# EAGLE board PoE_Board (EAGLE 7.3.0)
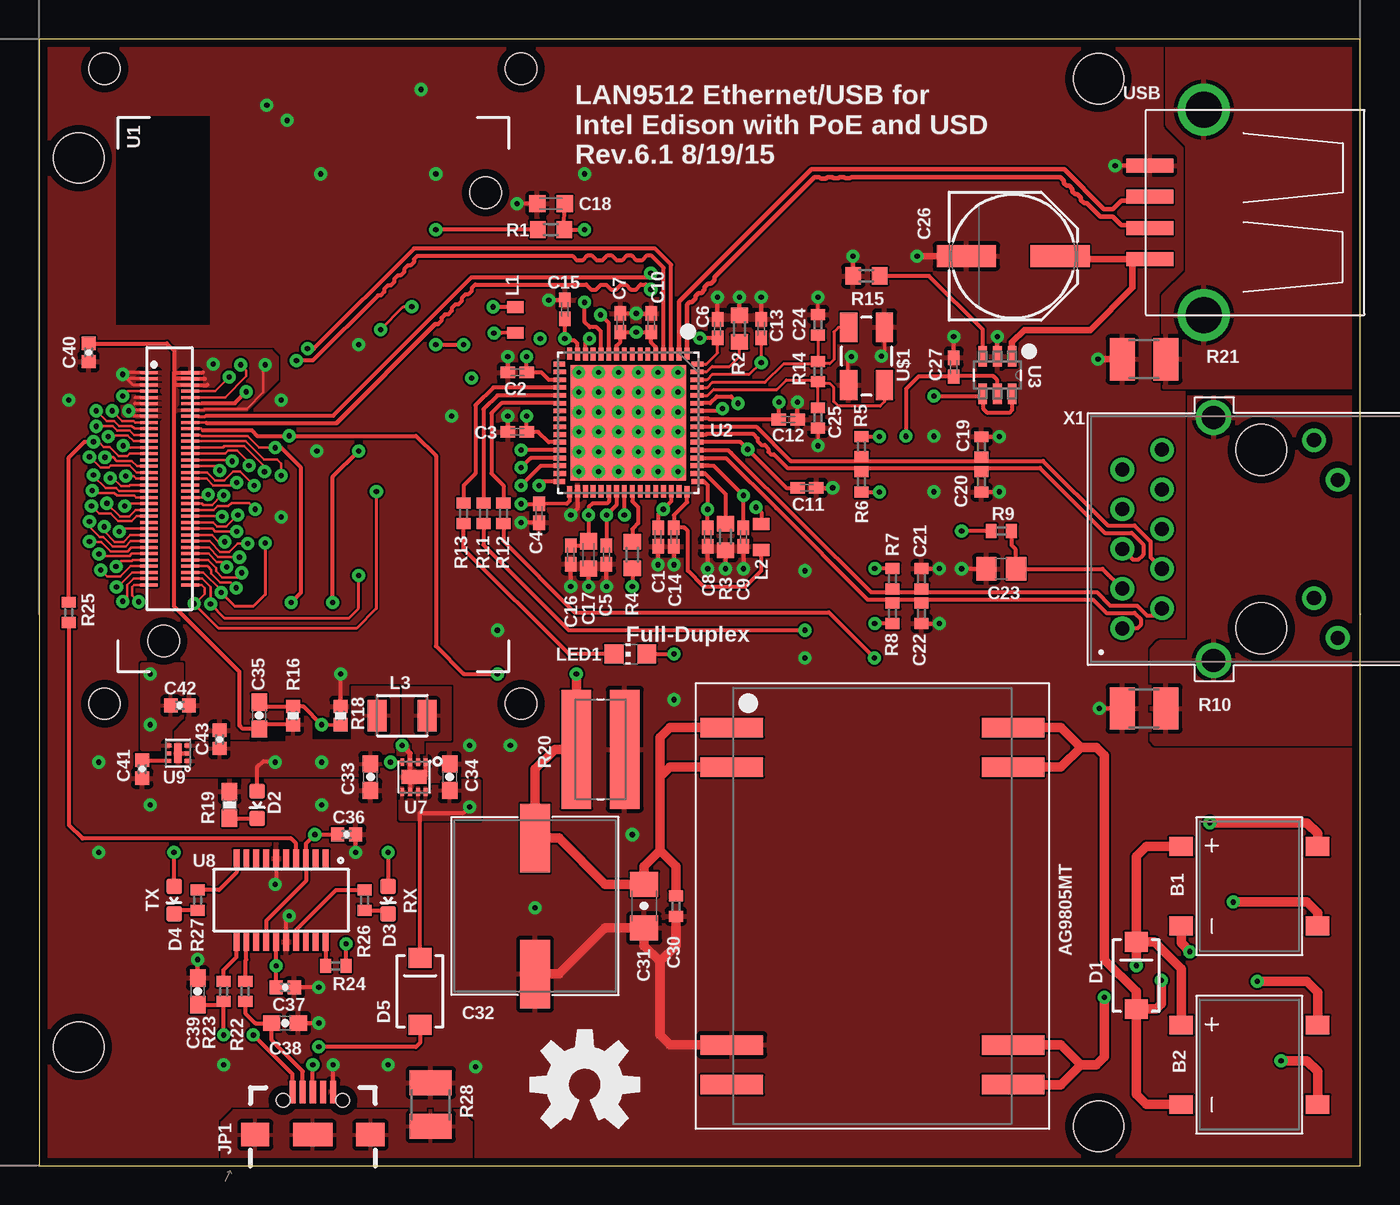
[diagram p0: board, top side]
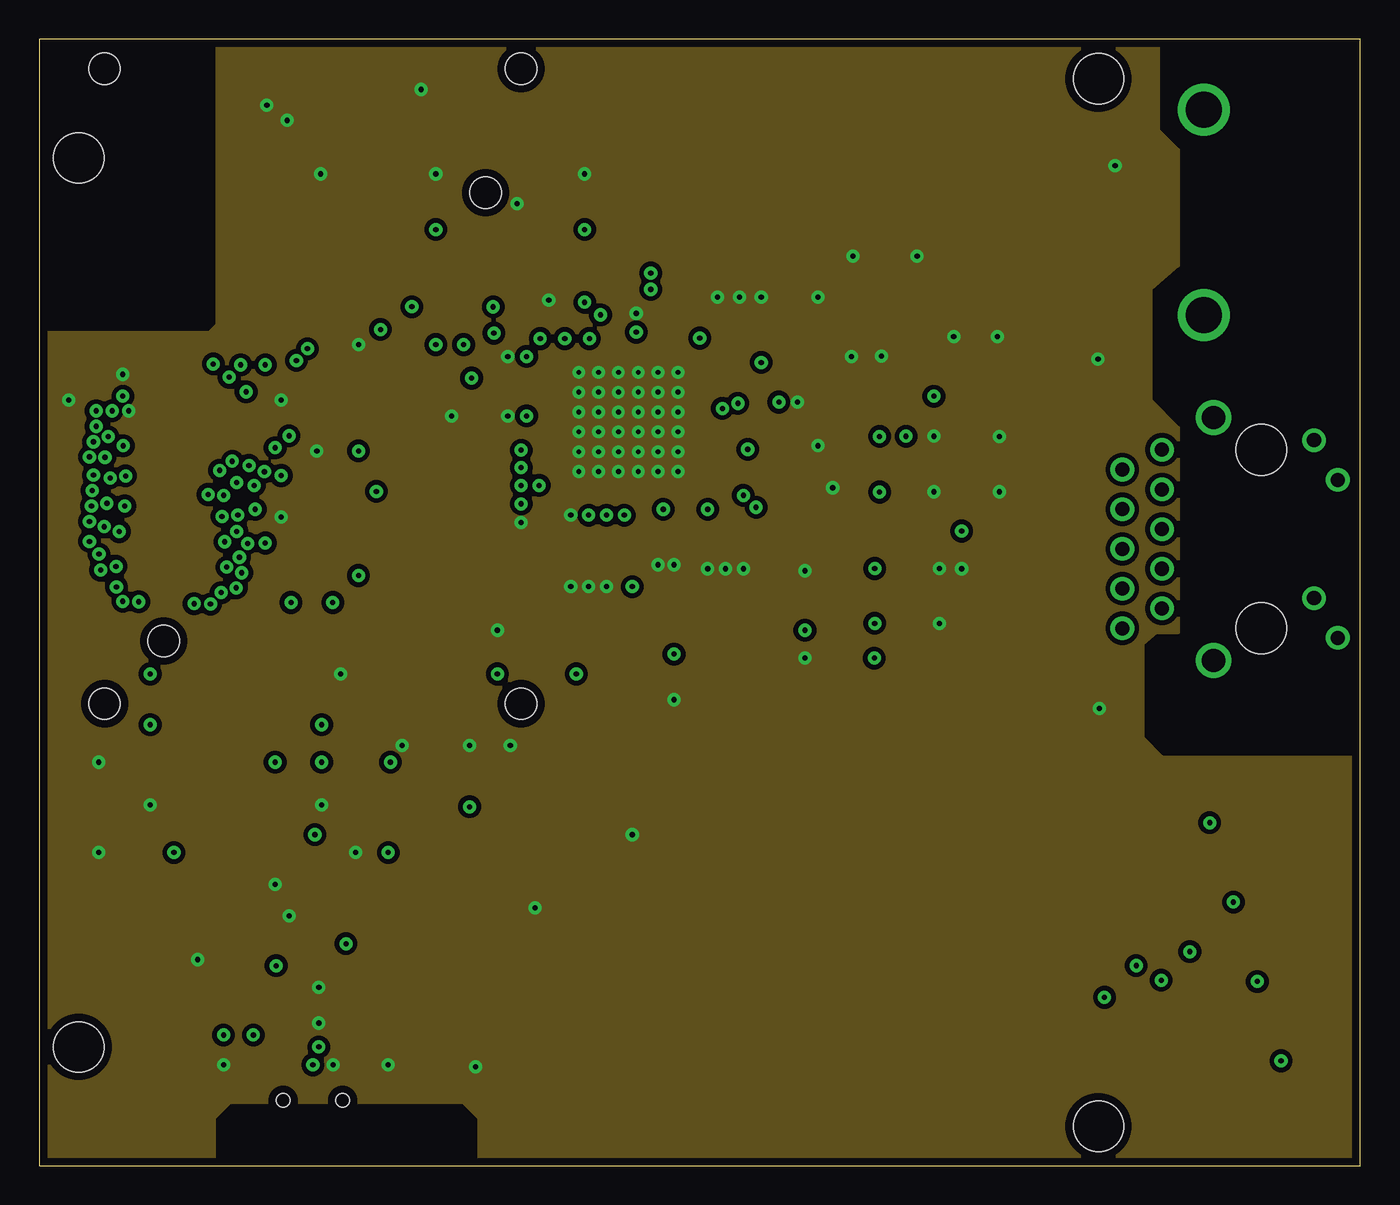
[diagram p1: board, inner layer gnd]
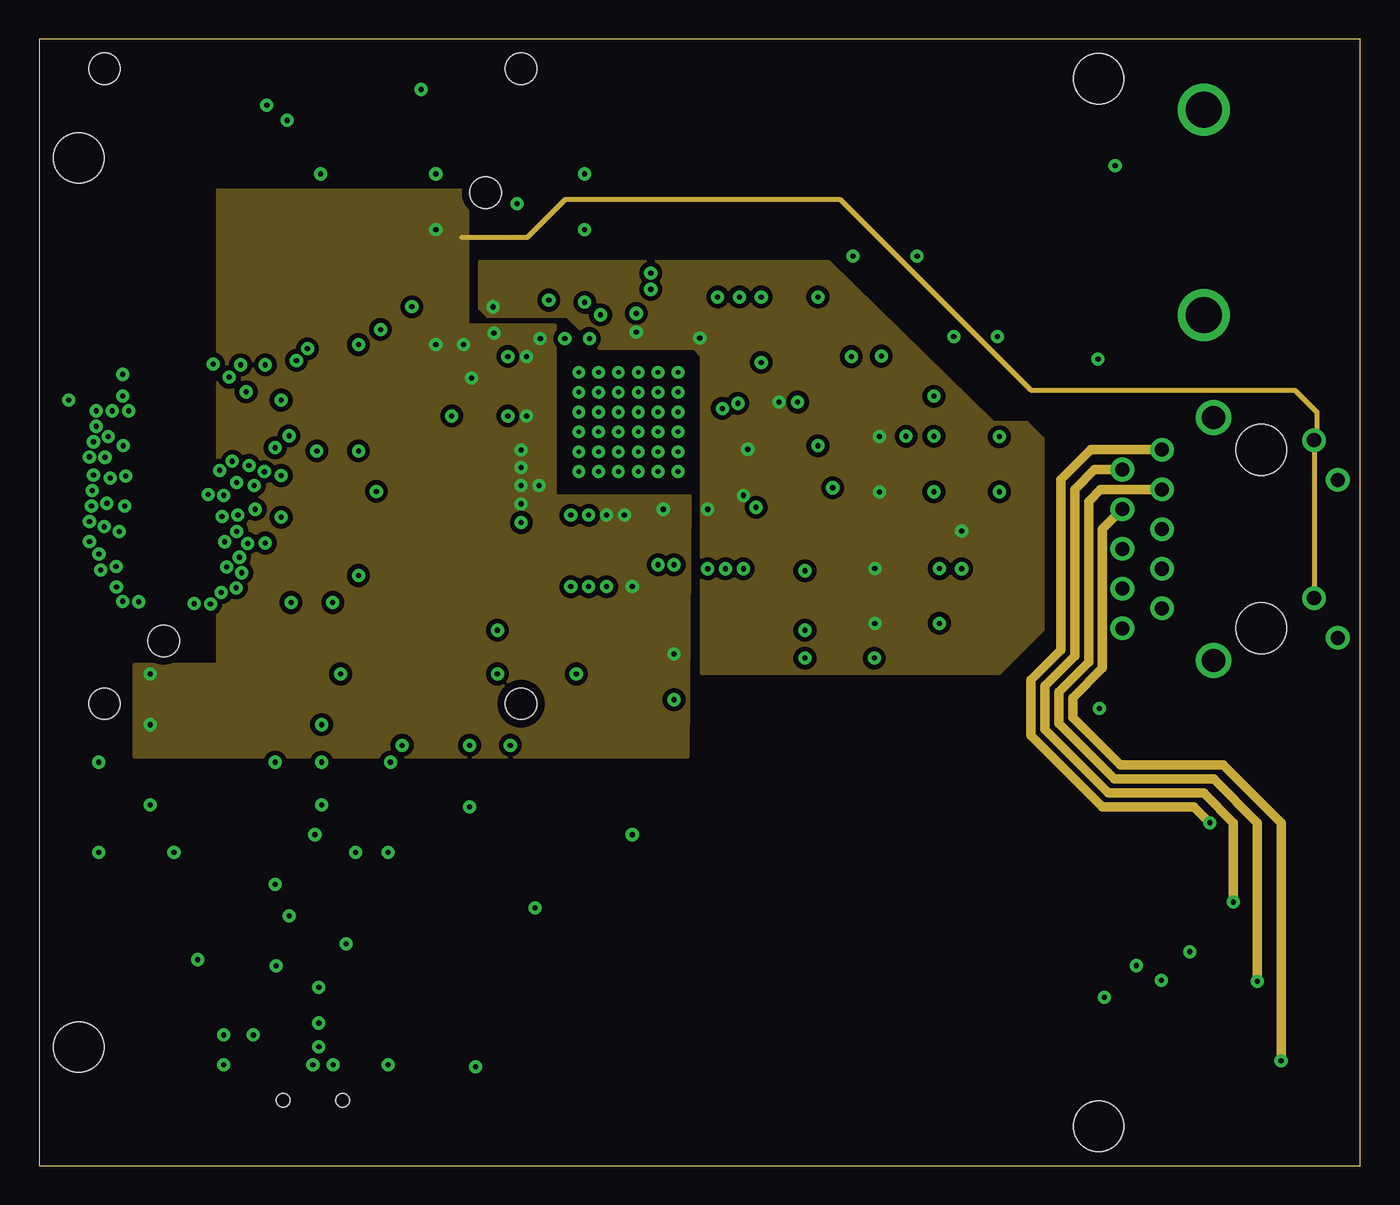
[diagram p2: board, inner layer pwr]
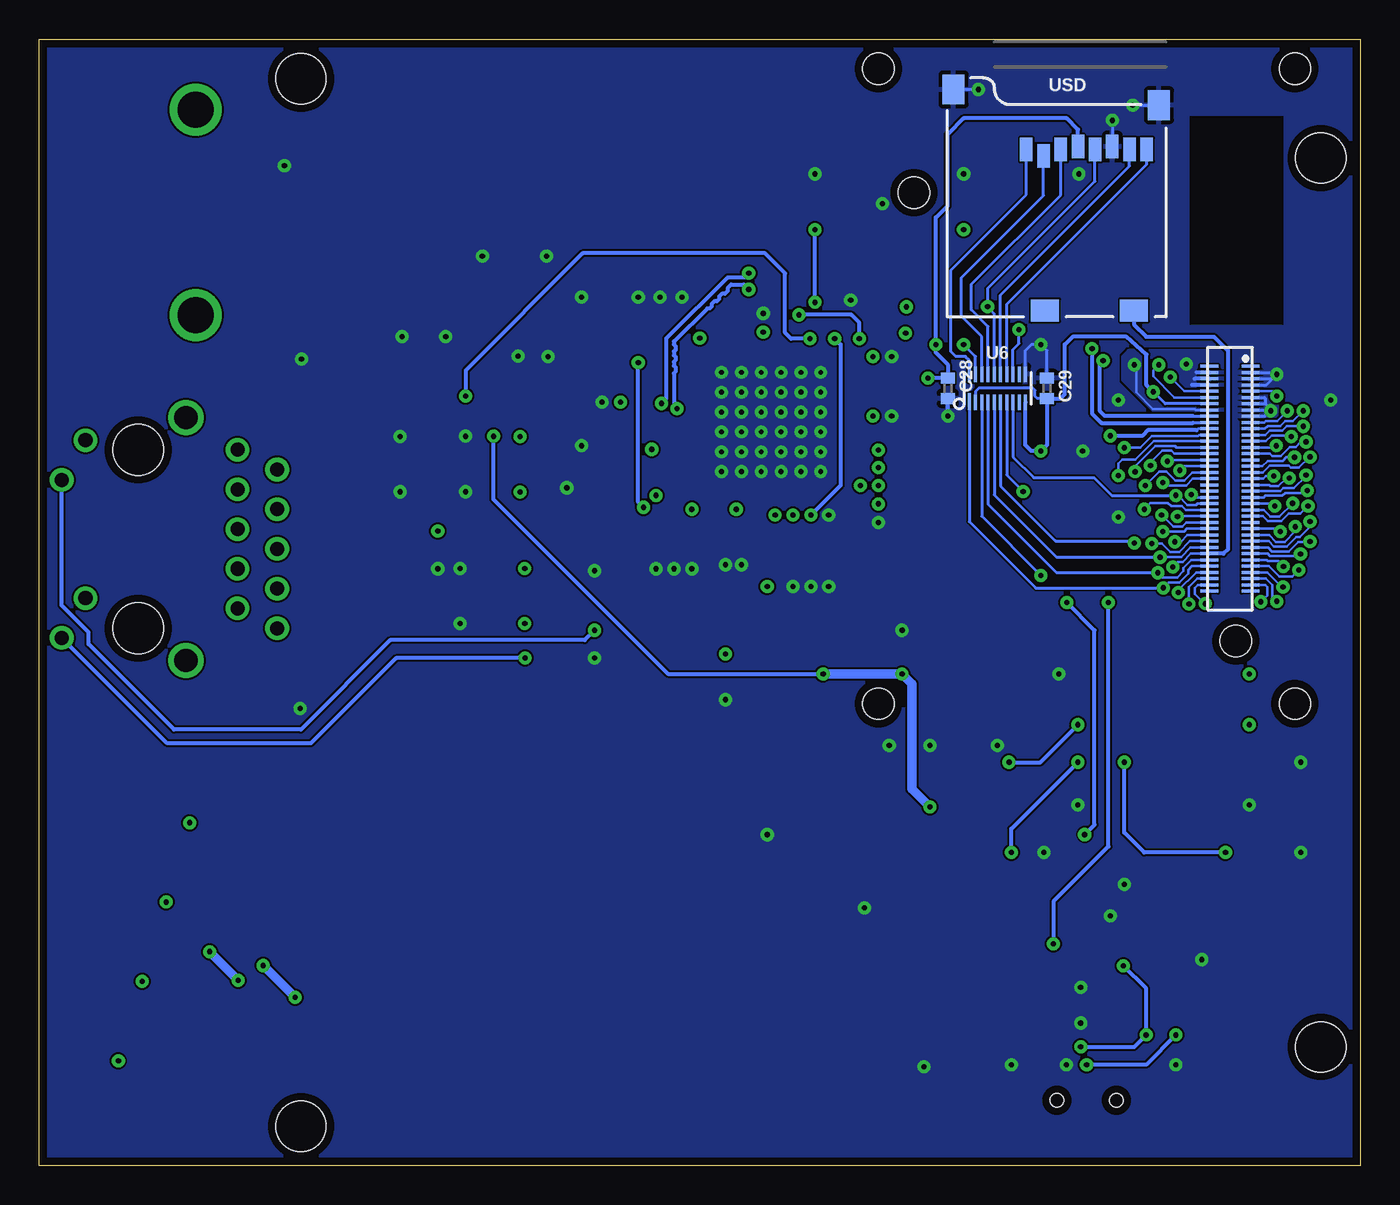
[diagram p3: board, bottom side, seen from below]

Size 84.58 x 72.14 mm. Coordinates in mm from the lower left corner, seen from the top.
Outline: 0,0 84.58,0 84.58,72.14 0,72.14 0,0
Copper layers (1*2*3*16): Top 0.035mm / dielectric 1.5mm / gnd 0.035mm / dielectric 0.15mm / pwr 0.035mm / dielectric 0.2mm / Bottom 0.035mm
Design rules "SparkFun1 *": minimum track width 5mil, minimum drill 6mil, track to track 5mil, track to pad 5mil, pad to pad 5mil, via to via 5mil, smd to smd 5mil, copper to edge 20mil, drill to drill 8mil, minimum pad ring 12mil, minimum via ring 10mil, stop-mask expansion 4mil, vias tented up to drill 25mil, thermal gap 10mil
Holes 2 mm at 4.19,29.59 30.86,29.59 30.86,70.23 4.19,70.23
Holes 3.2 mm at 2.54,7.62 2.54,64.52 67.82,69.6 67.82,2.54
tRestrict: area 5,53.8 to 10.9,67.2
bRestrict: area 5,53.8 to 10.9,67.2

## Footprints (pad centres in the part's own frame; a part is rotated, then mirrored left to right if it is on the bottom)
AG9800M_SMT = smd 1.25 x 4: P$1 -11.43,-9; P$2 -8.89,-9; P$3 8.89,-9; P$4 11.43,-9; P$5 11.43,9; P$6 8.89,9; P$7 -8.89,9; P$8 -11.43,9
DFS = smd 1.2 x 1.52: + 2.54,4.369; - -2.54,4.369; ~@1 -2.54,-4.369; ~@2 2.54,-4.369
C0402K = smd 0.925 x 0.74: 1 -0.6,0; 2 0.6,0
C0603K = smd 1.05 x 1.08: 1 -0.875,0; 2 0.875,0
C0402 = smd 0.7 x 0.9: 1 -0.65,0; 2 0.65,0
C0805 = smd 1.3 x 1.5: 1 -0.95,0; 2 0.95,0
PANASONIC_E = smd 3.8 x 1.4: + 3,0; - -3,0
1206-CAP = smd 1.6 x 1.8: 1 -1.4,0; 2 1.4,0
16SVPE470M = smd 4.4 x 1.9: 1 -4.35,0; 2 4.35,0
0603-CAP = smd 1.1 x 1: 1 -0.85,0; 2 0.85,0
0402-CAP = smd 0.85 x 0.9: 1 -0.58,0; 2 0.58,0
SMA-DIODE = smd 1.27 x 1.47: A -2.15,0; C 2.15,0
LED-0603 = smd 1 x 1: A 0,-0.877; C 0,0.877
USB-B-MICRO-SMD_V03 = smd 1.45 x 0.4: D+1 2.725,0; D-1 2.725,0.65; GND1 2.725,-1.3; ID1 2.725,-0.65; VBUS1 2.725,1.3 | smd 1.5 x 1.8: SHIELD1 0,3.685; SHIELD2 0,-3.685 | smd 1.5 x 2.5: SHIELD3 0,0 | hole 0.85: 2.2,1.9; 2.2,-1.9
L0603 = smd 0.75 x 1.05: 1 -0.825,0; 2 0.825,0
1210 = smd 1.2 x 2: 1 -1.6,0; 2 1.6,0
CHIP-LED0805 = smd 1.2 x 1.2: A 0,-1.05; C 0,1.05
R0603 = smd 1 x 1.1: 1 -0.85,0; 2 0.85,0
R0402 = smd 0.7 x 0.9: 1 -0.65,0; 2 0.65,0
R1210 = smd 1.6 x 2.7: 1 -1.4,0; 2 1.4,0
0402-RES = smd 0.85 x 0.9: 1 -0.58,0; 2 0.58,0
0603-RES = smd 1.1 x 1: 1 -0.85,0; 2 0.85,0
R1225 = smd 1.9 x 7.6: P$1 -1.55,0; P$2 1.55,0
EDISON_DAUGHTER = smd 1.14 x 0.2: 1 1.98,19.17; 2 4.62,19.17; 3 1.98,18.77; 4 4.62,18.77; 5 1.98,18.37; 6 4.62,18.37; 7 1.98,17.97; 8 4.62,17.97; 9 1.98,17.57; 10 4.62,17.57; 11 1.98,17.17; 12 4.62,17.17; 13 1.98,16.77; 14 4.62,16.77; 15 1.98,16.37; 16 4.62,16.37; 17 1.98,15.97; 18 4.62,15.97; 19 1.98,15.57; 20 4.62,15.57; 21 1.98,15.17; 22 4.62,15.17; 23 1.98,14.77; 24 4.62,14.77; 25 1.98,14.37; 26 4.62,14.37; 27 1.98,13.97; 28 4.62,13.97; 29 1.98,13.57; 30 4.62,13.57; 31 1.98,13.17; 32 4.62,13.17; 33 1.98,12.77; 34 4.62,12.77; 35 1.98,12.37; 36 4.62,12.37; 37 1.98,11.97; 38 4.62,11.97; 39 1.98,11.57; 40 4.62,11.57; 41 1.98,11.17; 42 4.62,11.17; 43 1.98,10.77; 44 4.62,10.77; 45 1.98,10.37; 46 4.62,10.37; 47 1.98,9.97; 48 4.62,9.97; 49 1.98,9.57; 50 4.62,9.57; 51 1.98,9.17; 52 4.62,9.17; 53 1.98,8.77; 54 4.62,8.77; 55 1.98,8.37; 56 4.62,8.37; 57 1.98,7.97; 58 4.62,7.97; 59 1.98,7.57; 60 4.62,7.57; 61 1.98,7.17; 62 4.62,7.17; 63 1.98,6.77; 64 4.62,6.77; 65 1.98,6.37; 66 4.62,6.37; 67 1.98,5.97; 68 4.62,5.97; 69 1.98,5.57; 70 4.62,5.57 | hole 2: 23.53,30.67; 2.93,1.98
QFN50P900X900X100-65N = smd 0.762 x 0.305: 1 -4.42,3.759; 16 -4.42,-3.759; 33 4.42,-3.759; 48 4.42,3.759 | smd 0.813 x 0.305: 2 -4.394,3.251; 3 -4.394,2.743; 4 -4.394,2.261; 5 -4.394,1.753; 6 -4.394,1.245; 7 -4.394,0.762; 8 -4.394,0.254; 9 -4.394,-0.254; 10 -4.394,-0.762; 11 -4.394,-1.245; 12 -4.394,-1.753; 13 -4.394,-2.261; 14 -4.394,-2.743; 15 -4.394,-3.251; 34 4.394,-3.251; 35 4.394,-2.743; 36 4.394,-2.261; 37 4.394,-1.753; 38 4.394,-1.245; 39 4.394,-0.762; 40 4.394,-0.254; 41 4.394,0.254; 42 4.394,0.762; 43 4.394,1.245; 44 4.394,1.753; 45 4.394,2.261; 46 4.394,2.743; 47 4.394,3.251 | smd 0.305 x 0.762: 17 -3.759,-4.42; 32 3.759,-4.42; 49 3.759,4.42; 64 -3.759,4.42 | smd 0.305 x 0.813: 18 -3.251,-4.394; 19 -2.743,-4.394; 20 -2.261,-4.394; 21 -1.753,-4.394; 22 -1.245,-4.394; 23 -0.762,-4.394; 24 -0.254,-4.394; 25 0.254,-4.394; 26 0.762,-4.394; 27 1.245,-4.394; 28 1.753,-4.394; 29 2.261,-4.394; 30 2.743,-4.394; 31 3.251,-4.394; 50 3.251,4.394; 51 2.743,4.394; 52 2.261,4.394; 53 1.753,4.394; 54 1.245,4.394; 55 0.762,4.394; 56 0.254,4.394; 57 -0.254,4.394; 58 -0.762,4.394; 59 -1.245,4.394; 60 -1.753,4.394; 61 -2.261,4.394; 62 -2.743,4.394; 63 -3.251,4.394 | smd 7.391 x 7.391: 65 0,0
21-0058I = smd 1.321 x 0.559: 1 -1.194,0.94; 2 -1.194,0; 3 -1.194,-0.94; 4 1.194,-0.94; 5 1.194,0; 6 1.194,0.94
DF40C-70DP-0.4(51) = smd 0.2 x 1.14 bottom: 1 6.8,1.32; 2 6.8,-1.32; 3 6.4,1.32; 4 6.4,-1.32; 5 6,1.32; 6 6,-1.32; 7 5.6,1.32; 8 5.6,-1.32; 9 5.2,1.32; 10 5.2,-1.32; 11 4.8,1.32; 12 4.8,-1.32; 13 4.4,1.32; 14 4.4,-1.32; 15 4,1.32; 16 4,-1.32; 17 3.6,1.32; 18 3.6,-1.32; 19 3.2,1.32; 20 3.2,-1.32; 21 2.8,1.32; 22 2.8,-1.32; 23 2.4,1.32; 24 2.4,-1.32; 25 2,1.32; 26 2,-1.32; 27 1.6,1.32; 28 1.6,-1.32; 29 1.2,1.32; 30 1.2,-1.32; 31 0.8,1.32; 32 0.8,-1.32; 33 0.4,1.32; 34 0.4,-1.32; 35 0,1.32; 36 0,-1.32; 37 -0.4,1.32; 38 -0.4,-1.32; 39 -0.8,1.32; 40 -0.8,-1.32; 41 -1.2,1.32; 42 -1.2,-1.32; 43 -1.6,1.32; 44 -1.6,-1.32; 45 -2,1.32; 46 -2,-1.32; 47 -2.4,1.32; 48 -2.4,-1.32; 49 -2.8,1.32; 50 -2.8,-1.32; 51 -3.2,1.32; 52 -3.2,-1.32; 53 -3.6,1.32; 54 -3.6,-1.32; 55 -4,1.32; 56 -4,-1.32; 57 -4.4,1.32; 58 -4.4,-1.32; 59 -4.8,1.32; 60 -4.8,-1.32; 61 -5.2,1.32; 62 -5.2,-1.32; 63 -5.6,1.32; 64 -5.6,-1.32; 65 -6,1.32; 66 -6,-1.32; 67 -6.4,1.32; 68 -6.4,-1.32; 69 -6.8,1.32; 70 -6.8,-1.32; NC1 7.2,1.32; NC2 7.2,-1.32; NC3 -7.2,-1.32; NC4 -7.2,1.32
UFDFN-20 = smd 0.2 x 1.1: 1 -1.8,-0.85 | smd 0.2 x 1: 2 -1.4,-0.9; 3 -1,-0.9; 4 -0.6,-0.9; 5 -0.2,-0.9; 6 0.2,-0.9; 7 0.6,-0.9; 8 1,-0.9; 9 1.4,-0.9; 10 1.8,-0.9; 11 1.8,0.9; 12 1.4,0.9; 13 1,0.9; 14 0.6,0.9; 15 0.2,0.9; 16 -0.2,0.9; 17 -0.6,0.9; 18 -1,0.9; 19 -1.4,0.9; 20 -1.8,0.9
WSON-8-PAD = smd 0.25 x 0.5: 1 -0.75,-0.95; 2 -0.25,-0.95; 3 0.25,-0.95; 4 0.75,-0.95; 5 0.75,0.95; 6 0.25,0.95; 7 -0.25,0.95; 8 -0.75,0.95 | smd 1.6 x 0.9: PAD 0,0
SSOP20_L = smd 0.381 x 1.143: 1 -2.857,-2.68; 2 -2.223,-2.68; 3 -1.587,-2.68; 4 -0.953,-2.68; 5 -0.318,-2.68; 6 0.318,-2.68; 7 0.953,-2.68; 8 1.587,-2.68; 9 2.223,-2.68; 10 2.857,-2.68; 11 2.857,2.68; 12 2.223,2.68; 13 1.587,2.68; 14 0.953,2.68; 15 0.318,2.68; 16 -0.318,2.68; 17 -0.953,2.68; 18 -1.587,2.68; 19 -2.223,2.68; 20 -2.857,2.68
6-UFDFN = smd 1.25 x 0.5: GND 0,0 | smd 0.26 x 0.4: P1 -0.5,-0.625; P2 0,-0.625; P3 0.5,-0.625; P4 0.5,0.625; P5 0,0.625; P6 -0.5,0.625
CRYSTAL-SMD-5X3 = smd 1.9 x 1.1: 1 -1.85,-1.15; 2 1.85,-1.15; 3 1.85,1.15; 4 -1.85,1.15
USB-A-S = smd 3 x 0.9: D+ 3.45,-1; D- 3.45,1; GND 3.45,-3; VBUS 3.45,3 | drill 2.311: P$5 0,-6.566; P$6 0,6.566
MICRO-SD-SOCKET-PP = smd 0.8 x 1.5: 1 -8.94,10.7; 2 -7.84,10.3; 3 -6.74,10.7; 4 -5.64,10.9; 5 -4.54,10.7; 6 -3.44,10.9; 7 -2.34,10.7; 8 -1.24,10.7 | smd 1.8 x 1.4: CD1 -2.05,0.4; CD2 -7.75,0.4 | smd 1.4 x 1.9: GND1 -13.6,14.55; GND3 -0.45,13.55
RB1-125BHQ1A = drill 0.9: L1 6.325,-3.38; L2 3.785,-4.9; L3 -3.785,-3.38; L4 -6.325,-4.9; R1 -5.715,8.89; R2 -4.445,6.35; R3 -3.175,8.89; R4 -1.905,6.35; R5 -0.635,8.89; R6 0.635,6.35; R7 1.905,8.89; R8 3.175,6.35; R9 4.445,8.89; R10 5.715,6.35 | drill 1.5: S1 -7.775,3.05; S2 7.775,3.05 | hole 3.25: -5.715,0; 5.715,0

## Placement (x,y rotation side)
AG9805MT  [AG9800M_SMT]  53.34,16.64 270 top
B1  [DFS]  77.47,17.91 90 top
B2  [DFS]  77.47,6.48 90 top
C1  0.1  [C0402K]  39.62,40.26 270 top
C2  0.1  [C0402K]  30.61,50.8 180 top
C3  0.1  [C0402K]  30.61,46.99 180 top
C4  0.1  [C0402K]  32,41.78 270 top
C5  0.1  [C0402K]  36.32,39.12 270 top
C6  0.1  [C0402K]  43.43,53.59 90 top
C7  0.1  [C0402K]  37.21,53.98 90 top
C8  0.1  [C0402K]  42.8,40.26 270 top
C9  0.1  [C0402K]  45.09,40.26 270 top
C10  0.1  [C0402K]  39.19,53.98 90 top
C11  0.1  [C0402K]  49.15,43.41 0 top
C12  0.1  [C0402K]  47.96,47.78 0 top
C13  1.0  [C0402K]  46.23,53.59 90 top
C14  0.1  [C0402K]  40.64,40.26 270 top
C15  0.1  [C0402K]  33.66,54.83 90 top
C16  0.1  [C0402K]  34.04,39.12 270 top
C17  4.7  [C0603K]  35.18,39.12 270 top
C18  0.01uF  [C0603K]  32.77,61.59 180 top
C19  15pF  [C0402]  60.33,46.02 90 top
C20  15pF  [C0402]  60.33,43.79 270 top
C21  15pF  [C0402]  56.49,37.59 90 top
C22  15pF  [C0402]  56.49,35.38 270 top
C23  0.022uF  [C0805]  61.59,38.23 180 top
C24  33pF  [C0402]  49.86,53.85 90 top
C25  33pF  [C0402]  49.86,47.88 270 top
C26  150uF  [PANASONIC_E]  62.36,58.24 0 top
C27  1.0  [C0402K]  58.55,51.13 90 top
C28  [C0402]  26.42,49.78 90 bottom
C29  [C0402]  20.07,49.78 270 bottom
C30  [C0402]  40.77,16.64 90 top
C31  [1206-CAP]  38.73,16.64 90 top
C32  [16SVPE470M]  31.75,16.64 90 top
C33  [0603-CAP]  21.21,24.89 90 top
C34  [0603-CAP]  26.29,24.89 270 top
C35  [0603-CAP]  14.1,28.83 90 top
C36  .1uF  [0402-CAP]  19.68,21.21 180 top
C37  .1uF  [0402-CAP]  15.76,11.42 180 top
C38  47pF  [0603-CAP]  15.75,9.14 0 top
C39  47pF  [0603-CAP]  10.16,11.18 90 top
C40  [0402-CAP]  3.17,52.07 90 top
C41  [0402-CAP]  6.6,25.4 270 top
C42  [0402-CAP]  9.02,29.46 0 top
C43  [0402-CAP]  11.56,27.3 90 top
D1  [SMA-DIODE]  70.23,12.19 90 top
D2  [LED-0603]  13.97,23.11 180 top
D3  RED  [LED-0603]  22.35,17.02 180 top
D4  YELLOW  [LED-0603]  8.64,17.02 180 top
D5  [SMA-DIODE]  24.38,11.18 90 top
E$2  [OSHW-LOGO-L]  34.92,5.21 0 top
JP1  USB-B-MICRO-SMD_V03  [USB-B-MICRO-SMD_V03]  17.53,2.01 90 top
L1  2.0A 120Ohm  [L0603]  30.49,54.16 90 top
L2  2.0A 120Ohm  [L0603]  46.23,40.26 270 top
L3  [1210]  23.24,28.83 0 top
LED1  Green LED  [CHIP-LED0805]  37.85,32.77 90 top
R1  10K  [R0603]  32.77,59.94 180 top
R2  12K  [R0603]  44.83,53.59 90 top
R3  12.4K  [R0603]  43.94,40.26 270 top
R4  10K  [R0603]  37.97,39.12 270 top
R5  49.9  [R0402]  52.65,46.05 90 top
R6  49.9  [R0402]  52.65,43.79 270 top
R7  49.9  [R0402]  54.64,37.59 90 top
R8  49.9  [R0402]  54.64,35.38 270 top
R9  10  [R0402]  61.59,40.64 180 top
R10  0  [R1210]  70.74,29.29 180 top
R11  330  [R0402]  28.45,41.78 90 top
R12  330  [R0402]  29.72,41.78 90 top
R13  330  [R0402]  27.18,41.78 90 top
R14  1M  [R0402]  49.86,50.85 270 top
R15  56k  [R0603]  52.96,56.97 0 top
R16  [0402-RES]  16.26,28.83 270 top
R18  [0402-RES]  19.3,28.83 270 top
R19  [0603-RES]  12.19,23.11 270 top
R20  [R1225]  35.94,26.67 0 top
R21  0  [R1210]  70.74,51.64 180 top
R22  [R0402]  13.21,11.18 90 top
R23  [R0402]  11.81,11.18 90 top
R24  [R0402]  19,12.81 180 top
R25  [R0402]  1.91,35.43 90 top
R26  [R0402]  20.83,17.02 90 top
R27  [R0402]  10.16,17.02 90 top
R28  0  [R1210]  25.07,3.94 270 top
U1  EDISON_CONNECTOR_FULLMOUNTING_HOLES  [EDISON_DAUGHTER]  5.05,31.62 0 top
U2  LAN9512-JZX  [QFN50P900X900X100-65N]  37.72,47.57 270 top
U3  MAX4995AAUT+  [21-0058I]  61.34,50.62 270 top
U4  EDISON_CONNECTOR_FULLHEADER  [DF40C-70DP-0.4(51)]  8.36,43.99 90 top
U6  [UFDFN-20]  23.24,49.78 0 bottom
U7  [WSON-8-PAD]  24,24.89 180 top
U8  [SSOP20_L]  15.49,17.02 180 top
U9  [6-UFDFN]  8.89,26.42 90 top
U$1  25MHz  [CRYSTAL-SMD-5X3]  52.97,51.84 270 top
USB  USB-A-S  [USB-A-S]  74.55,61.04 180 top
USD  [MICRO-SD-SOCKET-PP]  12.45,54.36 0 bottom
X1  [RB1-125BHQ1A]  78.23,40.13 90 top

## Library data of the parts
AG9805MT B1 B2 C32 R20 U9 X1 = PoEdev
C1-C22 C24 C25 C27 R15 = rcl
C23 R1-R14 R21-R28 = resistor
C26 C31 C33-C43 = SparkFun-Capacitors
C28 C29 L3 = SparkFun-Passives
C30 = eagle-ltspice
D1 D5 = SparkFun-DiscreteSemi
D2-D4 = SparkFun-LED
E$2 = SparkFun-Aesthetics
JP1 USB USD = SparkFun-Connectors
L1 L2 = murata-inductors
LED1 = led
R16 R18 R19 = SparkFun-Resistors
U1 U4 = Edison
U2 = Lan9512; MPN: LAN9512-JZX; OC_FARNELL: 2292586; OC_NEWARK: 66W1988; PACKAGE: 64VQFN; SUPPLIER: Microchip
U3 = MAX4995; MANUFACTURER_PART_NUMBER: max4995aaut+; VENDOR: MAXIM
U6 U8 = SparkFun-DigitalIC
U7 = SparkFun-PowerIC
U$1 = SparkFun-FreqCtrl

## Nets
1_A1_SDDAT2: U1.64 U4.64 U6.1
2_VCCA_1V8: C29.2 C36.2 U1.12 U4.12 U6.2 U6.10 U8.3 U8.14
3_A2_SDDAT3: U1.68 U4.68 U6.3
4_A3_SDCMD: U1.62 U4.62 U6.4
5_A4_SDCLK: U1.58 U4.58 U6.5
6_A5_SDAT0: U1.66 U4.66 U6.6
7_A6_SDDAT1: U1.70 U4.70 U6.7
8_A7_SDCLKFB: U1.44 U4.44 U6.8
14_B6_RSV: U6.14 USD.8
15_B5_DO: U6.15 USD.7
16_B4_13_B7_SCK: U6.13 U6.16 USD.5
17_B3_DI: U6.17 USD.3
18_B2_CS: U6.18 USD.2
20_B1_NC: U6.20 USD.1
DSUSB_N: U2.1 USB.D-
DSUSB_P: U2.2 USB.D+
FB: C35.2 R16.1 R18.2 U7.4
GND: AG9805MT.P$3 C1.2 C2.2 C3.2 C4.2 C5.2 C6.2 C7.2 C8.2 C9.2 C10.2 C11.2 C12.2 C13.2 C14.2 C15.2 C16.2 C17.2 C18.2 C19.2 C20.2 C21.2 C22.2 C23.2 C24.2 C25.2 C26.- C27.2 C28.1 C29.1 C30.1 C31.1 C32.1 C33.1 C34.1 C36.1 C37.1 C38.2 C39.2 C40.1 C41.2 C42.2 C43.2 JP1.GND1 R2.2 R3.2 R10.2 R15.1 R18.1 R19.1 R20.P$2 R21.2 R28.1 U1.1 U1.3 U1.5 U1.9 U1.11 U1.13 U1.15 U2.34 U3.2 U4.1 U4.3 U4.5 U4.9 U4.11 U4.13 U4.15 U6.11 U7.1 U7.3 U7.6 U7.PAD U8.6 U8.16 U9.GND U9.P2 U$1.2 U$1.4 USB.GND USD.6 USD.GND1 USD.GND3
MICRO_SHIELD: JP1.SHIELD1 JP1.SHIELD2 JP1.SHIELD3 R28.2
N$1: C13.1 L2.1 U2.62
N$2: C14.1 L2.2 U2.48
N$3: U2.16
N$4: C15.1 C16.1 C17.1 U2.15 U2.38
N$6: R2.1 U2.63
N$7: C18.1 R1.1 U2.12
N$8: R3.1 U2.50
N$9: R4.1 U2.41
N$10: C23.1 R9.1 X1.R3
N$15: R11.2 U2.21
N$17: R12.1 X1.L4
N$18: R12.2 U2.22
N$19: LED1.C R13.1
N$20: R13.2 U2.20
N$21: C24.1 R14.1 U2.61 U$1.1
N$22: C25.1 R14.2 U2.60 U$1.3
N$23: U2.14 U3.4 U3.6
N$25: C26.+ U3.1 USB.VBUS
N$26: R15.2 U3.3
P7: U1.7 U4.7
P17: U1.17 U4.17
P19: U1.19 U4.19
P21: U1.21 U4.21
P22: R24.1 U1.22 U4.22
P23: U1.23 U4.23
P24: U1.24 U4.24
P25: U1.25 U4.25
P26: U1.26 U4.26
P27: R25.2 U1.27 U4.27
P28: U1.28 U4.28
P30: U1.30 U4.30
P31: U1.31 U4.31
P32: U1.32 U4.32
P33: U1.33 U4.33
P34: U1.34 U4.34
P35: U1.35 U4.35
P36: U1.36 U4.36
P37: U1.37 U4.37
P39: U1.39 U4.39
P41: U1.41 U4.41
P42: U1.42 U4.42
P43: U1.43 U4.43
P45: U1.45 U4.45
P46: U1.46 U4.46
P47: U1.47 U4.47
P48: U1.48 U4.48
P50: U1.50 U4.50
P51: U1.51 U4.51
P52: U1.52 U4.52
P53: U1.53 U4.53
P54: U1.54 U4.54
P55: U1.55 U4.55
P56: U1.56 U4.56
P57: U1.57 U4.57
P59: U1.59 U4.59
P60: U1.60 U4.60 USD.CD1
P61: U1.61 U4.61
P63: U1.63 U4.63
P65: U1.65 U4.65
P67: U1.67 U4.67
P69: U1.69 U4.69
RX_N: C22.1 R8.1 U2.52 X1.R1
RX_P: C21.1 R7.1 U2.53 X1.R2
S$3: AG9805MT.P$5 AG9805MT.P$6 B1.+ B2.+ D1.C
S$4: U1.10 U4.10
S$5: U1.8 U4.8
S$6: C41.1 U9.P6
S$14: AG9805MT.P$7 AG9805MT.P$8 B1.- B2.- D1.A
S$15: C38.1 JP1.D-1 R22.1
S$16: R22.2 U8.12
S$17: C39.1 JP1.D+1 R23.1
S$18: R23.2 U8.11
S$19: D2.C R19.2
S$22: R25.1 U8.4
S$23: R24.2 U8.20
S$24: R27.2 U8.10
S$25: D4.C R27.1
S$26: R26.2 U8.17
S$27: D3.C R26.1
S$28: R11.1 X1.L2
SHLD: R10.1 X1.S1 X1.S2
SW: L3.2 U7.2
TX_N: C19.1 R5.1 U2.56 X1.R4
TX_P: C20.1 R6.1 U2.55 X1.R5
USB_VBUS: AG9805MT.P$1 AG9805MT.P$2 C27.1 C30.2 C31.2 C32.2 C34.2 D5.C R20.P$1 U1.20 U3.5 U4.20 U7.5 U7.7 U7.8
USBDOWN_N: U2.3 U4.18
USBDOWN_P: U2.4 U4.16
USBSHLD: R21.1 USB.P$5 USB.P$6
USBUP_N: U1.18 U2.58
USBUP_P: U1.16 U2.59
VA1: B2.~@1 X1.R7
VA2: B2.~@2 X1.R8
VB1: B1.~@2 X1.R10
VB2: B1.~@1 X1.R9
VBUS1: C37.2 D5.A JP1.VBUS1 U8.15
VDD3IO: C1.1 C2.1 C3.1 C4.1 C5.1 C28.2 C42.1 L1.1 LED1.A R1.2 R4.2 U2.11 U2.19 U2.27 U2.28 U2.29 U2.30 U2.32 U2.33 U2.39 U2.40 U2.46 U6.19 U9.P4 USD.4 X1.L1 X1.L3
VDD33A: C6.1 C7.1 C8.1 C9.1 C10.1 C11.1 C12.1 L1.2 R5.2 R6.2 R7.2 R8.2 R9.2 U2.5 U2.10 U2.49 U2.51 U2.54 U2.57 U2.64
VSYS: C33.2 C35.1 C40.2 C43.1 D2.A D3.A D4.A L3.1 R16.2 U1.2 U1.4 U1.6 U1.14 U4.2 U4.4 U4.6 U4.14 U9.P1 U9.P3

## Tracks (layer width: path | path; a pad name or v marks a point on that pad's centre or on a via)
1_A1_SDDAT2  (via drill 0.33)
  Top 0.152: v12.62,37.01 12.27,37.36 11.58,37.36 11.02,37.92 11.02,38.15 10.78,38.39 U4.64
  Bottom 0.152: U4.64 10.78,38.39 11.02,38.15 11.02,37.92 11.58,37.36 12.27,37.36 v12.62,37.01
  Bottom 0.178: U6.1 25.04,41.25 20.79,36.99 12.64,36.99 v12.62,37.01
2_VCCA_1V8  (via drill 0.33)
  Top 0.152: 10.41,48.79 10.44,48.82
  Top 0.203: U4.12 10.41,48.79
  Top 0.254: 10.44,48.82 12.52,48.82 v13.26,49.55 | v18.8,36.07 18.8,44.12 v20.45,45.77 | C36.2 v17.65,21.21 17.08,20.64 U8.3 17.08,18.24 14.54,15.7 U8.14
  Bottom 0.203: U6.2 24.64,49.58 24.43,49.78 20.95,49.78 20.83,49.66 20.83,49.28 20.69,49.13 C29.2 | U4.12 12.5,48.79 v13.26,49.55
  Bottom 0.254: v13.26,49.55 13.7,50 13.7,51.94 14.97,53.09 18.41,53.09 18.92,52.58 18.92,49.4 19.19,49.13 C29.2 20.07,46.15 v20.45,45.77 21.07,45.77 21.45,46.15 U6.10 | v18.8,36.07 17.02,34.29 17.02,21.84 v17.65,21.21
3_A2_SDDAT3  (via drill 0.33)
  Top 0.152: v10.97,35.97 10.97,37.06 10.44,37.59 U4.68
  Top 0.178: v10.97,35.97 11.89,35.05 19.81,35.05 20.45,35.69 v20.45,37.8
  Bottom 0.152: v10.97,35.97 10.97,37.06 10.44,37.59 U4.68
  Bottom 0.178: U6.3 24.24,41.59 v20.45,37.8
4_A3_SDCMD  (via drill 0.33)
  Top 0.152: v12.98,37.97 12.68,37.67 11.73,37.67 11.33,38.08 11.33,38.28 10.81,38.79 U4.62
  Bottom 0.152: U4.62 10.81,38.79 11.33,38.28 11.33,38.08 11.73,37.67 12.68,37.67 v12.98,37.97
  Bottom 0.178: U6.4 23.84,42.37 19.46,37.99 12.99,37.99 v12.98,37.97
5_A4_SDCLK  (via drill 0.33)
  Top 0.152: v12.83,38.96 12.8,38.99 11.48,38.99 10.88,39.59 U4.58
  Bottom 0.152: U4.58 10.88,39.59 11.48,38.99 12.8,38.99 v12.83,38.96
  Bottom 0.178: U6.5 23.44,42.96 19.46,38.98 12.84,38.98 v12.83,38.96
6_A5_SDAT0  (via drill 0.33)
  Top 0.152: v11.66,36.7 11.66,36.85 10.52,37.99 U4.66
  Top 0.178: v14.48,39.88 14.48,36.58 13.72,35.81 12.55,35.81 v11.66,36.7
  Bottom 0.152: v11.66,36.7 11.66,36.85 10.52,37.99 U4.66
  Bottom 0.178: U6.6 23.04,43.53 19.52,40.01 14.61,40.01 v14.48,39.88
7_A6_SDDAT1  (via drill 0.33)
  Top 0.152: v9.93,35.99 9.98,35.99 10.59,36.6 10.59,37.01 10.41,37.19 U4.70
  Top 0.178: v21.59,43.18 21.59,35.67 20.32,34.4 11.51,34.4 9.93,35.98 v9.93,35.99
  Bottom 0.152: v9.93,35.99 9.98,35.99 10.59,36.6 10.59,37.01 10.41,37.19 U4.70
  Bottom 0.178: U6.7 22.64,44.23 v21.59,43.18
8_A7_SDCLKFB  (via drill 0.33)
  Top 0.152: v11.81,42.93 11.66,42.9 11.07,42.32 10.52,42.32 10.44,42.39 U4.44
  Bottom 0.152: v11.81,42.93 11.66,42.9 11.07,42.32 10.52,42.32 10.44,42.39 U4.44
  Bottom 0.178: U6.8 22.24,45.38 20.92,44.06 17.06,44.06 15.93,42.93 v11.81,42.93
14_B6_RSV
  Bottom 0.178: U6.14 22.64,55.16 13.69,64.11 USD.8
15_B5_DO
  Bottom 0.178: U6.15 23.04,55.75 14.79,64 USD.7
16_B4_13_B7_SCK  (via drill 0.33)
  Top 0.203: v21.86,53.54 23.32,55 v23.86,55
  Bottom 0.178: 23.86,56.15 16.99,63.02 USD.5
  Bottom 0.203: U6.16 23.44,54.53 v23.86,55 23.86,56.15 | U6.13 22.24,52.26 21.86,52.64 v21.86,53.54
17_B3_DI
  Bottom 0.178: U6.17 23.84,53.73 24.91,54.8 24.91,56.44 19.19,62.16 USD.3
18_B2_CS
  Bottom 0.178: U6.18 24.24,53.08 25.55,54.39 25.55,56.86 20.29,62.12 USD.2
20_B1_NC
  Bottom 0.178: U6.20 25.04,51.58 25.27,51.82 25.91,51.82 26.21,52.12 26.21,57.35 21.39,62.18 USD.1
DSUSB_N
  Top 0.254: 69.79,60.21 71.08,60.02 USB.D-
  Top 0.3: U2.1 41.48,55.15 41.62,55.3 41.78,55.3 42.01,55.52 42.01,55.68 42.22,55.88 42.39,55.88 42.6,56.08 42.6,56.26 42.82,56.49 43,56.49 43.23,56.72 43.23,56.9 49.62,63.3 49.94,63.3 50.04,63.2 50.37,63.2 50.47,63.3 50.77,63.3 50.85,63.22 51.16,63.22 51.23,63.3 51.54,63.3 51.61,63.22 51.92,63.22 51.99,63.3 65.39,63.3 65.61,63.08 65.61,62.92 65.79,62.74 65.94,62.74 66.14,62.53 66.14,62.38 66.32,62.2 66.47,62.2 66.7,61.98 66.7,61.82 66.9,61.62 67.06,61.62 67.92,60.76 68.74,60.76 69.29,60.21 69.79,60.21
DSUSB_P
  Top 0.254: 70.96,61.8 USB.D+
  Top 0.3: U2.2 40.97,55.34 49.44,63.8 65.63,63.8 68.17,61.26 68.74,61.26 69.28,61.8 70.96,61.8
FB  (via drill 0.33)
  Top 0.254: R18.2 v18.09,28.25 16.92,29.41 R16.1 14.37,29.41 C35.2 | U7.4 v22.49,25.84
  Bottom 0.254: v22.49,25.84 20.48,25.84 v18.09,28.25
GND  (via drill 0.3, 0.33)
  Top 0.152: 6.14,49.19 6.12,49.17 | 6.15,48.39 | 6.08,47.99 6.04,48.03 | 5.64,50.39 v5.36,50.67 | 6.1,48.79
  Top 0.178: C25.2 v49.86,46.1 | 54.12,53.11 54.13,52.05 53.92,51.84 v53.91,51.84 | 51.76,50.05 51.77,51.59 v51.99,51.81 | C24.2 v49.86,55.63
  Top 0.203: U4.9 6.14,49.19 | U4.11 6.1,48.79 | U4.13 6.15,48.39 | U4.15 6.08,47.99 | U4.1 5.48,50.79 v5.36,50.67 6.04,49.99 U4.5 | U4.3 5.64,50.39
  Top 0.254: USB.GND 69.48,64.04 v68.88,64.02 | U3.2 v61.34,53.09 | 58.71,51.38 C27.2 v58.55,53.09 | 60.45,46.69 v61.47,46.69 | 60.43,43.16 v61.47,43.16 | C18.2 v30.61,61.59 | C12.2 v48.55,48.9 | C8.2 v42.8,38.23 | R3.2 v43.94,38.23 | C17.2 v35.18,37.08 | C3.2 v30.01,48.01 | C2.2 v30.01,51.82 | v36.32,37.08 C5.2 | U$1.4 54.12,53.11 | U$1.2 51.76,50.05 | R10.2 v67.87,29.29 | C23.2 v59.05,38.23 | C13.2 v46.23,55.63 | R2.2 v44.83,55.63 | C6.2 v43.43,55.63 | C15.2 v32.63,55.42 | C4.2 v30.86,41.18 | U2.34 34.47,42.09 v34.04,41.66 | C14.2 v40.64,38.48 | C1.2 v39.62,38.48 | C7.2 v38.23,54.58 C10.2 | v52.09,58.24 52.09,56.99 R15.1 | v16,16 15.81,15.81 U8.16 | C39.2 v10.16,13.21 | v17.91,11.43 C37.1 | v17.91,9.14 C38.2 | R18.1 v19.3,31.5 | 23.75,24.51 U7.6 | JP1.GND1 v18.83,6.48 | v20.27,20.07 C36.1 | U8.6 15.18,18.1 v15.11,18.03 | U7.1 24.75,25.01 24.64,24.89 U7.PAD | C9.2 v45.09,38.23 | C11.2 v50.8,43.41 | C16.2 v34.04,37.08 | C22.2 v57.63,34.73 | C21.2 v57.63,38.24 | U9.P2 U9.GND
  Top 0.27: C19.2 60.45,46.69 | C20.2 60.43,43.16
  Top 0.305: v23.24,26.92 23.75,26.41 U7.3 23.75,25.14 U7.PAD 24,24.77 23.75,24.51
  Top 0.406: R21.2 v67.79,51.64 | C26.- v56.2,58.24
  Top 0.61: AG9805MT.P$3 40.39,7.75 39.75,8.38 39.75,13.08 | C30.1 40.77,14.1 39.75,13.08 | 39.75,13.08 38.73,14.1 C31.1 36.22,15.24 33.27,12.29 C32.1
  Bottom 0.152: 6.12,48.79 6.1,48.82 | 5.9,48.2 5.97,48.15 | 5.64,50.39 v5.36,50.67
  Bottom 0.178: U6.11 21.44,52.2 21.06,52.58 v20.45,52.58 20.07,52.2 C29.1 | v14.58,67.91 USD.GND3 | v15.89,66.93 USD.6 | v24.45,68.91 USD.GND1
  Bottom 0.203: U4.9 6.14,49.19 6.1,49.15 6.1,48.82 v5.74,48.34 5.92,48.15 5.97,48.15 | U4.11 6.12,48.79 | U4.13 6.09,48.39 5.9,48.2 6.11,47.99 U4.15 | U4.1 5.48,50.79 v5.36,50.67 6.04,49.99 U4.5 | U4.3 5.64,50.39
  Bottom 0.254: v26.42,48.01 C28.1
  other vias: 34.54,50.8 39.62,49.53 35.81,50.8 37.08,50.8 38.35,50.8 39.62,50.8 34.54,49.53 34.54,48.26 34.54,45.72 38.35,45.72 34.54,46.99 35.81,49.53 37.08,49.53 37.08,48.26 38.35,49.53 40.89,50.8 35.81,48.26 38.35,48.26 39.62,48.26 39.62,46.99 40.89,49.53 35.81,46.99 37.08,46.99 38.35,46.99 39.62,45.72 40.89,48.26 37.08,45.72 34.54,44.45 35.81,45.72 40.89,46.99 40.89,45.72 35.81,44.45 37.08,44.45 38.35,44.45 39.62,44.45 40.89,44.45 30.16,26.92 27.56,26.92 17.78,45.77 15.49,41.53 15.49,49.02 1.91,49.02 34.92,63.5 3.81,25.84 7.11,23.11 18.08,23.11 3.81,20.07 11.81,6.48 27.94,6.35 22.35,6.48 31.75,16.51 37.97,21.21 40.64,29.84 29.34,34.29 49.02,32.51 49.02,38.1 57.28,43.15 25.4,63.5 18.03,63.5 57.28,46.71
  pour gnd (isolate 0.305): 84.58,0 28.19,0 28.19,3.05 27.18,4.06 12.19,4.06 11.18,3.05 11.18,0 0,0 0,53.34 10.92,53.34 11.43,53.85 11.43,72.14 71.63,72.14 71.63,66.29 72.9,65.02 72.9,57.66 71.12,56.13 71.12,49.02 72.9,47.24 72.9,34.16 71.5,34.16 70.61,33.4 70.61,27.43 71.88,26.16 84.58,26.16
  pour Top (rank 6): 0,72.14 0,0 84.58,0 84.58,72.14
  pour Bottom (rank 6): 84.58,0 84.58,72.14 0,72.14 0,0
MICRO_SHIELD
  pour Top: 11.68,0.51 11.68,2.79 12.45,3.56 26.92,3.56 27.69,2.79 27.69,0.51
N$1  (via drill 0.33)
  Top 0.178: U2.62 42.75,50.32 43.1,50.67 45.47,50.67 v46.23,51.44 C13.1
  Top 0.254: v45.9,42.16 46.23,41.83 L2.1
  Bottom 0.254: v45.9,42.16 46.23,42.49 v46.23,51.44
N$2
  Top 0.254: U2.48 41.48,42.49 40.64,41.66 C14.1 41.31,40.86 41.53,40.64 41.53,38.1 42.55,37.08 45.21,37.08 46.23,38.1 L2.2
N$4  (via drill 0.33)
  Top 0.254: U2.38 36.47,42.55 36.35,42.42 35.43,42.42 35.18,42.16 v35.18,41.66 C17.1 34.9,39.72 C16.1 | U2.15 34.47,52.65 34.29,52.83 33.78,52.83 v33.66,52.96 C15.1
  Bottom 0.254: v33.66,52.96 33.27,52.58 33.27,43.56 v35.18,41.66
N$6
  Top 0.178: U2.63 42.72,50.83 43.08,51.18 44.2,51.18 44.83,51.82 R2.1
N$7  (via drill 0.33)
  Top 0.254: U2.12 35.97,53.42 35.69,53.7 35.26,53.7 34.92,54.03 v34.92,55.28 | v34.92,59.94 R1.1 C18.1
  Bottom 0.254: v34.92,55.28 v34.92,59.94
N$8
  Top 0.254: U2.50 42.62,44.32 43.94,43 R3.1
N$9
  Top 0.254: U2.41 37.97,42.55 38.35,42.16 38.35,41.15 37.97,40.77 R4.1
N$10
  Top 0.254: X1.R3 68.07,38.23 C23.1 62.48,38.29 62.48,39.5 62.24,39.74 R9.1
N$15
  Top 0.254: U2.21 29.34,49.33 28.45,48.44 R11.2
N$17  (via drill 0.33)
  Top 0.254: R12.1 29.72,40.01 34.29,35.43 50.55,35.43 v53.47,32.51
  Bottom 0.27: v53.47,32.51 61.72,32.51 67.18,27.05 76.38,27.05 X1.L4
N$18
  Top 0.254: U2.22 29.59,48.82 28.96,48.18 28.96,44.32 29.72,43.56 R12.2
N$19
  Top 0.254: LED1.C 33.91,32.77 27.18,39.5 R13.1
N$20
  Top 0.254: U2.20 29.08,49.84 27.94,48.69 27.94,44.32 27.18,43.56 R13.2
N$21
  Top 0.152: 49.64,51.36 R14.1 50,51.36
  Top 0.178: U2.61 42.77,49.84 43.1,50.16 46.48,50.16 47.68,51.36 49.64,51.36 | C24.1 R14.1 | U$1.1 51.16,53.68 50.88,53.39 50.88,51.61 50.62,51.36 50,51.36
N$22
  Top 0.152: 49.74,50.32 R14.2 49.97,50.09
  Top 0.178: U2.60 42.8,49.33 43.18,49.71 47.22,49.71 47.83,50.32 49.74,50.32 | C25.1 R14.2 | U$1.3 54.12,48.92 53.83,48.63 51.16,48.63 50.88,48.91 50.88,49.84 50.62,50.09 49.97,50.09
N$23  (via drill 0.33)
  Top 0.254: U2.14 34.98,52.7 v35.23,52.96 | U3.6 62.28,48.39 62.1,48.21 60.71,48.21 60.45,48.46 60.45,49.38 U3.4 60.2,49.28 v57.28,49.28
  Bottom 0.254: v35.23,52.96 36.45,52.96 36.83,53.34 36.83,57.15 38.1,58.42 49.78,58.42 57.28,50.93 v57.28,49.28
N$25
  Top 0.254: USB.VBUS 69.98,58.04 | 66.12,58.04 C26.+
  Top 0.406: 66.12,58.04 69.98,58.04 69.98,56.21 67.28,53.51 63.06,53.51 62.28,52.74 U3.1
N$26
  Top 0.254: U3.3 60.4,53.54 56.97,56.97 R15.2
P7  (via drill 0.33)
  Top 0.152: v5.36,49.28 5.68,49.59 U4.7
  Bottom 0.152: v5.36,49.28 5.67,49.59 U4.7
P17  (via drill 0.33)
  Top 0.152: U4.17 6.15,47.59 6.07,47.68 5.33,47.68 v4.67,48.34
  Bottom 0.152: v4.67,48.34 5.33,47.68 6.07,47.68 6.15,47.59 U4.17
P19  (via drill 0.33)
  Top 0.152: v3.66,48.34 4.32,47.68 4.83,47.68 5.13,47.37 5.94,47.37 6.12,47.19 U4.19
  Bottom 0.152: U4.19 6.12,47.19 5.94,47.37 5.13,47.37 4.83,47.68 4.32,47.68 v3.66,48.34
P21  (via drill 0.33)
  Top 0.152: U4.21 6.09,46.79 5.82,47.07 5,47.07 4.7,47.37 3.68,47.37 v3.66,47.35
  Bottom 0.152: v3.66,47.35 3.68,47.37 4.7,47.37 5,47.07 5.82,47.07 6.09,46.79 U4.21
P22  (via drill 0.33)
  Top 0.152: U4.22 10.32,46.79 10.4,46.71 13.36,46.71 14.1,45.97 v15.11,45.97
  Top 0.254: v16.13,36.07 16.76,36.7 16.76,44.7 15.49,45.97 v15.11,45.97 | R24.1 v19.65,14.22
  Bottom 0.152: U4.22 10.32,46.79 10.4,46.71 13.36,46.71 14.1,45.97 v15.11,45.97
  Bottom 0.254: v16.13,36.07 16.13,20.45 19.65,16.92 v19.65,14.22
P23  (via drill 0.33)
  Top 0.152: U4.23 6.06,46.39 5.69,46.76 4.5,46.76 v4.42,46.69
  Bottom 0.152: v4.42,46.69 4.5,46.76 5.69,46.76 6.06,46.39 U4.23
P24  (via drill 0.33)
  Top 0.152: U4.24 13.22,46.39 14.4,45.21 15.24,45.21 15.49,44.96 v15.49,44.2
  Bottom 0.152: U4.24 13.22,46.39 14.4,45.21 15.24,45.21 15.49,44.96 v15.49,44.2
P25  (via drill 0.33)
  Top 0.152: U4.25 5.49,45.99 v5.38,46.1
  Bottom 0.152: v5.38,46.1 5.49,45.99 U4.25
P26  (via drill 0.33)
  Top 0.152: U4.26 11.78,45.99 11.86,46.08 13.13,46.08 14.43,44.78 v14.43,44.44
  Bottom 0.152: U4.26 11.78,45.99 11.86,46.08 13.13,46.08 14.43,44.78 v14.43,44.44
P27  (via drill 0.33)
  Top 0.152: U4.27 5.79,45.59 5.64,45.44 5.11,45.44 4.52,46.02 4.14,46.02 3.81,46.35 v3.48,46.35
  Top 0.254: v3.48,46.35 2.92,46.35 1.91,45.34 R25.2
  Bottom 0.152: v3.48,46.35 3.81,46.35 4.14,46.02 4.52,46.02 5.11,45.44 5.64,45.44 5.79,45.59 U4.27
P28  (via drill 0.33)
  Top 0.152: v13.44,44.83 13.44,45.03 12.68,45.8 12.12,45.8 11.91,45.59 U4.28
  Bottom 0.152: v13.44,44.83 13.44,45.03 12.68,45.8 12.12,45.8 11.91,45.59 U4.28
P30  (via drill 0.33)
  Top 0.152: v12.37,45.11 12.29,45.19 U4.30
  Bottom 0.152: 12.29,45.19 | U4.30 12.29,45.19 | 12.29,45.19 v12.37,45.11
P31  (via drill 0.33)
  Top 0.152: v4.22,45.36 4.75,45.36 4.98,45.14 5.94,45.14 6.29,44.79 U4.31
  Bottom 0.152: v4.22,45.36 4.75,45.36 4.98,45.14 5.94,45.14 6.29,44.79 U4.31
P32  (via drill 0.33)
  Top 0.152: U4.32 11.29,44.79 v11.56,44.53
  Bottom 0.152: v11.56,44.53 11.29,44.79 U4.32
P33  (via drill 0.33)
  Top 0.152: v3.23,45.39 3.25,45.39 3.94,44.7 4.47,44.7 4.6,44.83 5.82,44.83 6.25,44.39 U4.33
  Bottom 0.152: v3.23,45.39 3.25,45.39 3.94,44.7 4.47,44.7 4.6,44.83 5.82,44.83 6.25,44.39 U4.33
P34  (via drill 0.33)
  Top 0.152: v13.77,43.56 12.88,44.45 12.42,44.45 11.84,43.87 11.28,43.87 10.75,44.39 U4.34
  Bottom 0.152: U4.34 10.75,44.39 11.28,43.87 11.84,43.87 12.42,44.45 12.88,44.45 v13.77,43.56
P35  (via drill 0.33)
  Top 0.152: v5.54,44.17 6.04,44.17 6.22,43.99 U4.35
  Bottom 0.152: v5.54,44.17 6.04,44.17 6.22,43.99 U4.35
P36  (via drill 0.33)
  Top 0.152: v12.65,43.74 12.47,43.56 11.15,43.56 10.72,43.99 U4.36
  Bottom 0.152: U4.36 10.72,43.99 11.15,43.56 12.47,43.56 v12.65,43.74
P37  (via drill 0.33)
  Top 0.152: v4.55,44.04 4.72,44.04 5.26,43.51 5.77,43.51 5.85,43.59 U4.37
  Bottom 0.152: U4.37 5.85,43.59 5.77,43.51 5.26,43.51 4.72,44.04 v4.55,44.04
P39  (via drill 0.33)
  Top 0.152: v3.48,44.22 3.48,44.17 4.27,43.38 4.95,43.38 5.14,43.19 U4.39
  Bottom 0.152: v3.48,44.22 3.48,44.17 4.27,43.38 4.95,43.38 5.14,43.19 U4.39
P41  (via drill 0.33)
  Top 0.152: v3.4,43.23 3.56,43.08 4.83,43.08 5,42.9 6.1,42.9 6.2,42.79 U4.41
  Bottom 0.152: v3.4,43.23 3.56,43.08 4.83,43.08 5,42.9 6.1,42.9 6.2,42.8 U4.41
P42  (via drill 0.33)
  Top 0.152: v10.82,42.98 10.64,42.79 U4.42
  Bottom 0.152: v10.82,42.98 10.64,42.79 U4.42
P43  (via drill 0.33)
  Top 0.152: U4.43 5.64,42.39 v5.49,42.24
  Bottom 0.152: U4.43 5.64,42.39 v5.49,42.24
P45  (via drill 0.33)
  Top 0.152: v4.34,42.42 5.18,41.58 5.77,41.58 6.18,41.99 U4.45
  Bottom 0.152: v4.34,42.42 5.18,41.58 5.77,41.58 6.18,41.99 U4.45
P46  (via drill 0.33)
  Top 0.152: v13.84,42.04 13.44,42.44 12.32,42.44 12.12,42.24 11.43,42.24 11.18,41.99 U4.46
  Bottom 0.152: v13.84,42.04 13.44,42.44 12.32,42.44 12.12,42.24 11.43,42.24 11.18,41.99 U4.46
P47  (via drill 0.33)
  Top 0.152: v3.35,42.24 3.83,41.76 4.57,41.76 5.05,41.27 5.94,41.27 6.26,41.59 U4.47
  Bottom 0.152: v3.35,42.24 3.83,41.76 4.57,41.76 5.05,41.27 5.94,41.27 6.26,41.59 U4.47
P48  (via drill 0.33)
  Top 0.152: U4.48 11.7,41.59 v11.71,41.58
  Bottom 0.152: v11.71,41.58 11.7,41.59 U4.48
P50  (via drill 0.33)
  Top 0.152: v12.72,41.66 11.99,40.92 11.4,40.92 11.13,41.19 U4.50
  Bottom 0.152: U4.50 11.13,41.19 11.4,40.92 11.99,40.92 v12.72,41.66
P51  (via drill 0.33)
  Top 0.152: U4.51 5.31,40.79 v5.13,40.62
  Bottom 0.152: v5.13,40.62 5.31,40.79 U4.51
P52  (via drill 0.33)
  Top 0.152: v12.65,40.62 11.28,40.62 11.1,40.79 U4.52
  Bottom 0.152: U4.52 11.1,40.79 11.28,40.62 v12.65,40.62
P53  (via drill 0.33)
  Top 0.152: U4.53 5.85,40.39 5.41,39.95 4.85,39.95 4.17,40.64 v4.17,40.92
  Bottom 0.152: v4.17,40.92 4.17,40.64 4.85,39.95 5.41,39.95 5.85,40.39 U4.53
P54  (via drill 0.33)
  Top 0.152: U4.54 11.07,40.39 11.51,39.95 v11.89,39.95
  Bottom 0.152: v11.89,39.95 11.51,39.95 11.07,40.39 U4.54
P55  (via drill 0.33)
  Top 0.152: v3.23,41.25 3.23,40.92 3.89,40.26 4.12,40.26 4.72,39.65 5.54,39.65 5.88,39.99 U4.55
  Bottom 0.152: U4.55 5.88,39.99 5.54,39.65 4.72,39.65 4.12,40.26 3.89,40.26 3.23,40.92 v3.23,41.25
P56  (via drill 0.33)
  Top 0.152: v13.35,39.85 12.72,39.85 12.17,39.29 11.61,39.29 10.91,39.99 U4.56
  Bottom 0.152: U4.56 10.91,39.99 11.61,39.29 12.17,39.29 12.72,39.85 v13.35,39.85
P57  (via drill 0.33)
  Top 0.152: v3.23,39.98 3.25,39.95 3.99,39.95 4.6,39.34 5.66,39.34 5.91,39.59 U4.57
  Bottom 0.152: v3.23,39.98 3.25,39.95 3.99,39.95 4.6,39.34 5.66,39.34 5.91,39.59 U4.57
P59  (via drill 0.33)
  Top 0.152: U4.59 5.94,39.19 5.79,39.04 3.96,39.04 v3.83,39.17
  Bottom 0.152: v3.83,39.17 3.96,39.04 5.79,39.04 5.94,39.19 U4.59
P60  (via drill 0.33)
  Top 0.152: v12.01,38.33 11.68,38.66 11.38,38.66 10.85,39.19 U4.60
  Bottom 0.152: U4.60 10.85,39.19 11.38,38.66 11.68,38.66 v12.01,38.33
  Bottom 0.27: USD.CD1 14.5,53.87 13.72,53.09 9.37,53.09 8.48,52.2 8.48,39.47 8.76,39.19 U4.60
P61  (via drill 0.33)
  Top 0.152: v4.93,38.38 5.26,38.71 5.92,38.71 6,38.79 U4.61
  Bottom 0.152: v4.93,38.38 5.26,38.71 5.92,38.71 6,38.79 U4.61
P63  (via drill 0.33)
  Top 0.152: v3.94,38.15 4.37,37.72 5.21,37.72 5.88,38.39 U4.63
  Bottom 0.152: v3.94,38.15 4.37,37.72 5.21,37.72 5.88,38.39 U4.63
P65  (via drill 0.33)
  Top 0.152: v4.95,37.06 5.03,37.06 5.96,37.99 U4.65
  Bottom 0.152: v4.95,37.06 5.03,37.06 5.96,37.99 U4.65
P67  (via drill 0.33)
  Top 0.152: U4.67 6.05,37.59 5.64,37.19 5.64,36.42 v5.36,36.14
  Bottom 0.152: v5.36,36.14 5.64,36.42 5.64,37.19 6.05,37.59 U4.67
P69  (via drill 0.33)
  Top 0.152: U4.69 6.1,37.19 5.97,37.06 5.97,36.52 v6.38,36.12
  Bottom 0.152: v6.38,36.12 5.97,36.52 5.97,37.06 6.1,37.19 U4.69
RX_N
  Top 0.27: X1.R1 70.31,34.42 70.52,34.63 70.52,35 70.12,35.4 68.31,35.4 67.46,36.25 56.49,36.25 | U2.52 43.97,45.31 47.19,42.11 53.03,36.25 54.63,36.25 | 54.63,36.25 56.49,36.25 | R8.1 54.63,36.25 | C22.1 56.49,36.25
RX_P
  Top 0.27: U2.53 44.11,45.82 44.29,45.64 53.26,36.73 54.63,36.73 | X1.R2 71.43,35.23 70.92,35.23 70.28,35.87 68.56,35.87 67.7,36.73 56.49,36.73 | 54.63,36.73 56.49,36.73 | R7.1 54.63,36.73 | C21.1 56.49,36.73
S$3  (via drill 0.33)
  Top 0.61: B1.+ 70.87,20.45 70.23,19.81 D1.C | v68.2,10.79 68.2,6.99 67.69,6.48 66.67,6.48 | 66.67,6.48 65.41,7.75 AG9805MT.P$6 | AG9805MT.P$5 65.41,5.21 66.67,6.48 | D1.C v70.23,12.83 | D1.C 71.38,14.34 73.1,12.62 B2.+
  Bottom 0.61: v70.23,12.83 v68.2,10.79
S$4  (via drill 0.33)
  Top 0.152: U4.10 11.91,49.19 13.26,50.55 13.26,50.93 v12.9,51.28
  Bottom 0.152: v12.9,51.28 13.26,50.93 13.26,50.55 11.91,49.19 U4.10
S$5  (via drill 0.33)
  Top 0.152: U4.8 11.26,49.59 v12.17,50.49
  Bottom 0.152: v12.17,50.49 11.26,49.59 U4.8
S$6
  Top 0.254: U9.P6 6.67,25.92 C41.1
S$14  (via drill 0.33)
  Top 0.61: B2.- 70.87,3.94 70.23,4.57 D1.A | 66.67,26.8 67.69,26.8 68.2,26.29 68.2,13.21 70.23,11.18 D1.A | 66.67,26.8 65.41,28.07 AG9805MT.P$8 | AG9805MT.P$7 65.41,25.53 66.67,26.8 | v73.66,13.72 73.1,14.28 B1.- | v71.83,11.89 71.83,10.36 71.51,10.04 D1.A
  Bottom 0.61: v73.66,13.72 v71.83,11.89
S$15
  Top 0.254: JP1.D-1 16.88,6.05 14.9,8.03 C38.1 13.84,9.14 13.21,9.78 R22.1
S$16
  Top 0.254: U8.12 13.27,13.22 13.21,13.16 R22.2
S$17  (via drill 0.33)
  Top 0.254: v11.81,8.38 R23.1 11.61,10.33 C39.1 | JP1.D+1 v17.53,6.48
  Bottom 0.254: v11.81,8.38 13.72,6.48 v17.53,6.48
S$18
  Top 0.254: U8.11 12.64,13.37 11.81,12.55 R23.2
S$19
  Top 0.254: R19.2 12.73,22.24 D2.C
S$22
  Top 0.254: U8.4 16.45,20.64 16.13,20.95 2.79,20.95 1.91,21.84 R25.1
S$23
  Top 0.254: U8.20 R24.2
S$24
  Top 0.254: U8.10 12.64,18.78 11.52,17.67 R27.2
S$25
  Top 0.254: R27.1 8.86,16.37 D4.C
S$26
  Top 0.254: U8.17 16.45,15.1 19.01,17.67 20.57,17.67 R26.2
S$27
  Top 0.254: R26.1 22.12,16.37 D3.C
S$28  (via drill 0.33)
  Top 0.254: R11.1 28.45,39.75 33.91,34.29 v49.02,34.29
  Bottom 0.27: v49.02,34.29 49.66,33.66 62.1,33.66 67.82,27.94 75.95,27.94 81.41,33.4 81.41,34.16 83.13,35.89 X1.L2
SHLD
  pour Top (isolate 0.406, rank 2): 71.25,27.25 71.25,33.02 71.75,33.53 73.66,33.53 73.66,49.91 84.58,49.91 84.58,27 71.5,27
SW
  pour Top (rank 3): 23.37,30.61 26.29,30.61 26.29,27.3 24.51,27.3 24.51,25.65 24,25.65 24,27.18 23.37,27.18
TX_N
  Top 0.27: U2.56 45.92,47.32 48.1,45.14 52.65,45.14 | 52.65,45.14 60.33,45.14 | 60.33,45.14 64.27,45.14 68.41,41 70.12,41 71.14,39.98 71.14,38.97 X1.R4 | C19.1 60.33,45.14 | R5.1 52.65,45.14
TX_P
  Top 0.27: U2.55 42.67,46.81 42.73,46.87 45.7,46.87 46,46.56 46,46.41 46.23,46.15 46.46,46.15 46.69,45.9 46.69,45.72 46.86,45.54 47.04,45.54 47.9,44.68 52.65,44.68 | X1.R5 70.04,38.8 70.35,38.8 70.67,39.12 70.67,39.79 69.93,40.53 68.22,40.53 64.07,44.68 60.33,44.68 | 52.65,44.68 60.33,44.68 | C20.1 60.33,44.68 | R6.1 52.65,44.68
USB_VBUS  (via drill 0.33)
  Top 0.152: 10.49,47.09 10.39,47.19 U4.20
  Top 0.254: 10.49,47.09 13.61,47.09 13.97,46.74 v16,46.74 24.13,46.74 25.4,45.47 25.4,33.27 27.18,31.5 v29.34,31.5 | v55.5,46.71 55.5,49.73 56.3,50.53 C27.1 58.56,50.55 61.09,50.55 61.34,50.29 U3.5 | D5.C 24.38,22.61 27.18,22.61 v27.56,22.99
  Top 0.61: AG9805MT.P$1 40.39,28.07 39.75,27.43 39.75,24.89 | 39.75,24.89 39.75,20.19 | C30.2 40.77,19.18 39.75,20.19 | AG9805MT.P$2 40.39,25.53 39.75,24.89 | 39.75,20.19 38.73,19.18 C31.2 36.22,18.04 33.27,20.99 C32.2 | C32.2 31.75,22.07 | C32.2 31.75,25.4 33.02,26.67 R20.P$1 v34.39,31.5
  Bottom 0.152: 10.49,47.09 10.39,47.19 U4.20
  Bottom 0.254: v34.39,31.5 44.32,31.5 55.5,42.67 v55.5,46.71 | 10.49,47.09 13.61,47.09 13.97,46.74 v16,46.74
  Bottom 0.61: v34.39,31.5 v29.34,31.5 28.7,30.86 28.7,24.13 v27.56,22.99
  pour Top (rank 2): 23.11,22.23 28.19,22.23 28.19,24.64 25.53,24.64 25.53,24.26 23.11,24.26
USBDOWN_N  (via drill 0.33)
  Top 0.27: U2.3 40.46,57.69 39.42,58.73 24,58.73 17.58,52.31 v17.18,52.31
  Bottom 0.152: 10.72,47.56 10.69,47.59
  Bottom 0.203: 10.69,47.59 U4.18
  Bottom 0.27: 10.72,47.56 16.58,47.56 17.18,48.16 v17.18,52.31
USBDOWN_P  (via drill 0.33)
  Top 0.27: U2.4 39.98,57.49 39.21,58.26 38.88,58.26 38.58,57.96 38.25,57.96 37.95,58.27 37.62,58.27 37.31,57.96 36.98,57.96 36.68,58.27 36.35,58.27 36.04,57.96 35.71,57.96 35.41,58.27 35.08,58.27 34.77,57.96 34.44,57.96 34.15,58.26 24.22,58.26 24,58.04 24,57.86 23.77,57.63 23.6,57.63 23.37,57.4 23.37,57.23 23.14,57 22.96,57 22.73,56.77 22.73,56.59 22.5,56.36 22.33,56.36 22.1,56.13 22.1,55.96 21.87,55.73 21.69,55.73 17.52,51.56 v16.47,51.56
  Bottom 0.152: 10.73,48.03 10.69,47.99
  Bottom 0.203: 10.69,47.99 U4.16
  Bottom 0.27: 10.73,48.03 16.38,48.03 16.71,48.36 16.71,51.32 v16.47,51.56
USBSHLD
  pour Top (isolate 0.406): 72.01,49.86 72.01,55.7 73.53,57.23 73.53,65.35 72.26,66.62 72.26,71.96 84.58,71.96 84.45,49.86
USBUP_N  (via drill 0.33)
  Top 0.152: 10.72,47.56 10.69,47.59 U1.18
  Top 0.27: 10.72,47.56 19.05,47.56 | 25.53,53.87 25.76,54.1 25.76,54.28 25.98,54.51 26.19,54.51 26.42,54.74 26.42,54.91 26.64,55.14 26.82,55.14 27.05,55.37 27.05,55.55 27.28,55.78 27.46,55.78 27.69,56.01 27.69,56.2 27.91,56.42 35.02,56.42 35.33,56.11 35.66,56.11 35.97,56.41 36.3,56.41 36.6,56.11 36.93,56.11 37.24,56.41 37.57,56.41 37.87,56.11 38.2,56.11 38.51,56.42 38.84,56.42 v39.15,56.11 | v43.74,48.49 43.59,48.34 U2.58
  Top 0.29: 19.05,47.56 25.36,53.87 25.53,53.87
  Bottom 0.27: v43.74,48.49 43.94,48.69 43.94,50.75 43.84,50.85 43.84,51.13 43.94,51.23 43.94,51.49 43.84,51.59 43.84,51.79 43.94,51.89 43.94,52.15 43.84,52.25 43.84,52.48 43.94,52.58 43.94,52.78 41.81,54.89 41.66,54.89 41.53,55.02 41.53,55.17 41.35,55.35 41.2,55.35 41.05,55.5 41.05,55.65 40.87,55.83 40.69,55.83 40.51,56.01 40.51,56.19 40.28,56.42 39.47,56.42 v39.15,56.11
USBUP_P  (via drill 0.33)
  Top 0.178: U1.16 10.16,47.98 10.64,47.98 10.72,48.03
  Top 0.27: 10.72,48.03 18.83,48.03 27.69,56.89 38.89,56.89 v39.15,57.15 | U2.59 42.95,48.82 43.38,49.25 44.3,49.25 v44.73,48.82
  Bottom 0.27: v44.73,48.82 44.42,49.12 44.42,52.98 40.49,56.89 39.41,56.89 v39.15,57.15
VA1  (via drill 0.33)
  Top 0.61: v79.5,6.73 81.15,6.73 81.84,6.04 B2.~@1
  pwr 0.61: X1.R7 68.07,40.77 68.07,31.88 66.17,29.97 66.17,28.7 69.22,25.65 75.82,25.65 79.5,21.97 v79.5,6.73
VA2  (via drill 0.33)
  Top 0.61: v77.98,11.81 81.15,11.81 81.84,11.12 B2.~@2
  pwr 0.61: X1.R8 67.94,43.31 67.18,42.55 67.18,32.26 65.28,30.35 65.28,28.32 68.83,24.77 75.18,24.77 77.98,21.97 v77.98,11.81
VB1  (via drill 0.33)
  Top 0.61: v74.93,21.97 81.15,21.97 81.84,21.29 B1.~@2
  pwr 0.61: v74.93,21.97 73.91,22.99 68.07,22.99 63.5,27.56 63.5,31.11 65.41,33.02 65.41,43.94 67.31,45.85 X1.R10
VB2  (via drill 0.33)
  Top 0.61: v76.45,16.89 81.15,16.89 81.84,16.2 B1.~@1
  pwr 0.61: X1.R9 67.56,44.58 66.29,43.31 66.29,32.64 64.39,30.73 64.39,27.94 68.45,23.88 74.55,23.88 76.45,21.97 v76.45,16.89
VBUS1  (via drill 0.33)
  Top 0.254: C37.2 v15.18,12.81 U8.15 | JP1.VBUS1 16.23,5.87 v13.72,8.38 | D5.A 24.38,7.87 24.13,7.62 v17.91,7.62
  Bottom 0.254: v15.18,12.81 13.72,11.35 v13.72,8.38 14.48,7.62 v17.91,7.62
VDD3IO  (via drill 0.33)
  Top 0.254: U2.46 40.46,42.55 v39.95,42.04 39.62,41.71 C1.1 | U2.39 36.96,42.29 v36.32,41.66 C5.1 | R4.2 v37.97,37.08 | U2.33 33.96,42.57 33.78,42.39 C4.1 v30.86,42.38 | U2.32 32.26,43.81 v32,43.56 | U2.29 31.47,45.31 v30.86,44.7 | U2.28 v30.86,45.82 | U2.27 32.61,46.33 31.95,46.99 C3.1 v31.21,48.01 | U2.19 32.64,50.32 32.16,50.8 C2.1 v31.21,51.82 | U2.11 36.47,53.95 v35.94,54.48 | L1.1 29.6,53.33 v29.11,53.31 | R1.2 v25.4,59.94 | LED1.A v40.64,32.77 | v37.47,41.66 U2.40 | v30.86,43.56 32.13,44.83 U2.30 | v25.4,52.58 v27.18,52.58
  pwr 0.305: 27.05,59.44 31.24,59.44 33.66,61.85 51.31,61.85 63.5,49.66 80.39,49.66 81.79,48.26 81.79,46.63 X1.L1 X1.L3
  Bottom 0.203: U6.19 24.64,51.82 v25.4,52.58
  Bottom 0.254: v32.08,52.96 32.08,53.98 32.59,54.48 v35.94,54.48 | v27.69,50.43 C28.2 26.42,51.31 27.18,52.07 v27.18,52.58 27.18,60.71 26.42,61.47 26.42,66.04 25.4,67.06 18.8,67.06 18.09,66.35 USD.4
  other vias: 7.11,31.5 7.11,28.24
  pour pwr (isolate 0.305): 27.43,53.85 33.02,53.85 33.02,42.93 41.66,42.93 41.53,26.16 6.1,26.16 6.1,32.13 11.43,32.13 11.43,62.48 27.43,62.48
  pour Top: 8.38,26.67 6.6,26.67 6.6,32.13 9.14,32.13 9.14,28.7 8.38,27.94
VDD33A  (via drill 0.33)
  Top 0.178: U2.64 42.72,51.33 43.43,52.05 C6.1
  Top 0.254: L1.2 v29.07,54.99 | R5.2 v53.8,46.7 | R7.2 v53.49,38.24 | R8.2 v53.49,34.73 | R6.2 v53.8,43.14 | R9.2 v59.05,40.64 | U2.57 42.86,47.83 42.91,47.78 C12.1 v47.35,48.9 | C6.1 v42.29,52.99 | U2.10 36.96,52.49 37.21,52.74 C7.1 v38.23,53.38 C10.1 | U2.5 39.47,52.43 39.18,52.72 39.18,53.34 | U2.49 42.56,43.81 42.69,43.69 42.8,43.56 v42.8,42.04 C8.1 | 42.88,44.83 U2.51 43.18,44.83 v45.09,42.93 C9.1 | U2.54 44.91,46.33 v45.36,45.87 47.83,43.41 C11.1
  Top 0.27: 39.18,53.34 C10.1
  pour pwr (isolate 0.305): 42.42,31.5 42.42,51.82 41.91,52.32 35.81,52.32 33.78,54.36 28.7,54.36 28.19,54.86 28.19,57.91 50.55,57.91 61.09,47.62 63.25,47.62 64.26,46.61 64.26,34.29 61.47,31.5
VSYS  (via drill 0.33)
  Top 0.152: v14.48,51.28 14.35,50.94 14.35,49.53 13.28,48.46 10.59,48.46 10.52,48.39 U4.14
  Top 0.254: 10.48,50.79 U4.2 U1.2 8.64,50.8 | 10.62,50.39 U4.4 8.74,50.39 8.64,50.29 8.64,50.04 8.68,49.99 U4.6 10.78,49.99 | R16.2 14.37,28.25 C35.1 13.04,27.98 12.83,28.19 12.83,31.62 8.64,35.81 8.64,50.8 | v22.35,20.07 D3.A | D4.A v8.64,20.07 | C40.2 8.18,52.65 8.64,52.2 8.64,50.8 | D2.A 13.97,25.53 14.35,25.91 15.05,25.91 v15.11,25.84
  Bottom 0.152: v14.48,51.28 14.35,50.94 14.35,49.53 13.28,48.46 10.59,48.46 10.52,48.39 U4.14
  Bottom 0.254: U4.2 10.48,50.79 | U4.4 10.62,50.39 | U4.6 10.78,49.99 | v8.64,20.07 13.84,20.07 15.11,21.34 v15.11,25.84 | v22.35,20.07 22.35,21.58 v18.09,25.84
  other vias: 11.15,51.33
  pour Top: 8.64,48.26 8.64,52.2 14.86,52.2 15.24,51.82 15.24,50.29 13.21,48.26
  pour Top (rank 3): 9.4,27.05 9.4,25.02 21.97,25.02 21.97,26.04 22.99,26.04 22.99,30.61 20.07,30.61 20.07,27.18 17.4,27.18 17.4,28.96 15.88,28.96 15.88,27.05
  pour Bottom (rank 2): 13.21,48.26 8.64,48.26 8.64,52.2 14.86,52.2 15.24,51.82 15.24,50.29

## Text on the board
tPlace: LAN9512 Ethernet/USB for / Intel Edison with PoE and USD / Rev.6.1 8/19/15 | Full-Duplex | TX | RX
tDocu: Designed By: Chleo Bales-Heisterkamp and Asa Graf